# EAGLE board PCB#7 v2 (EAGLE 9.7.0)
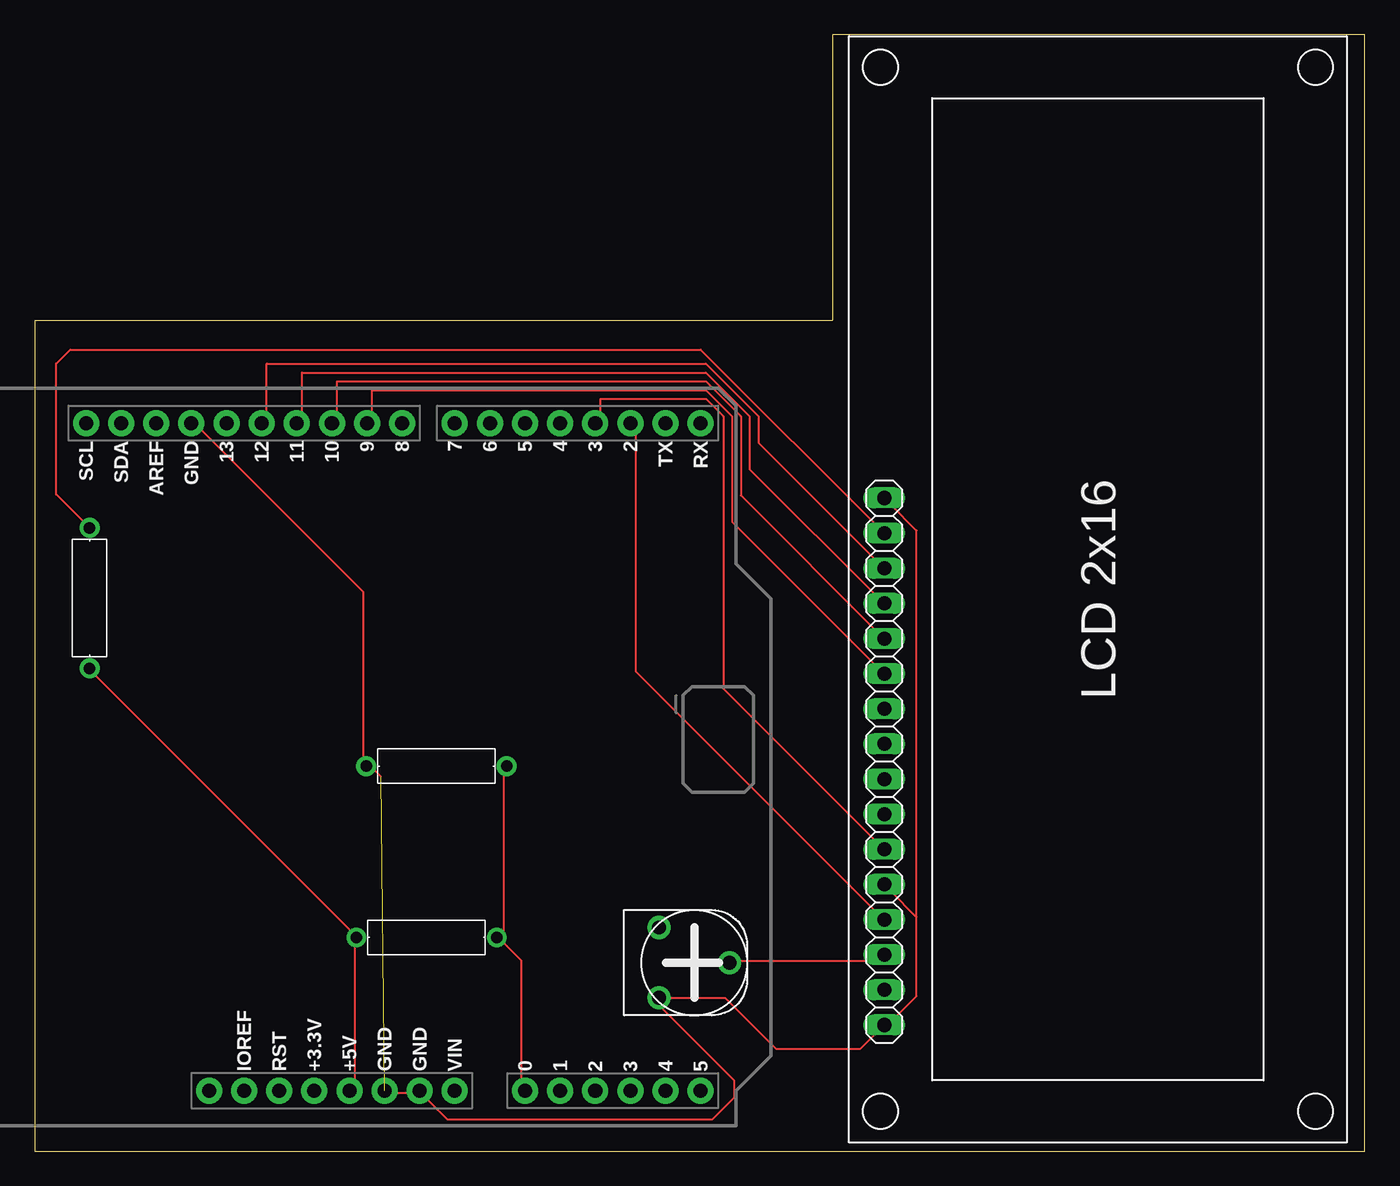
[diagram p0: board, top side]
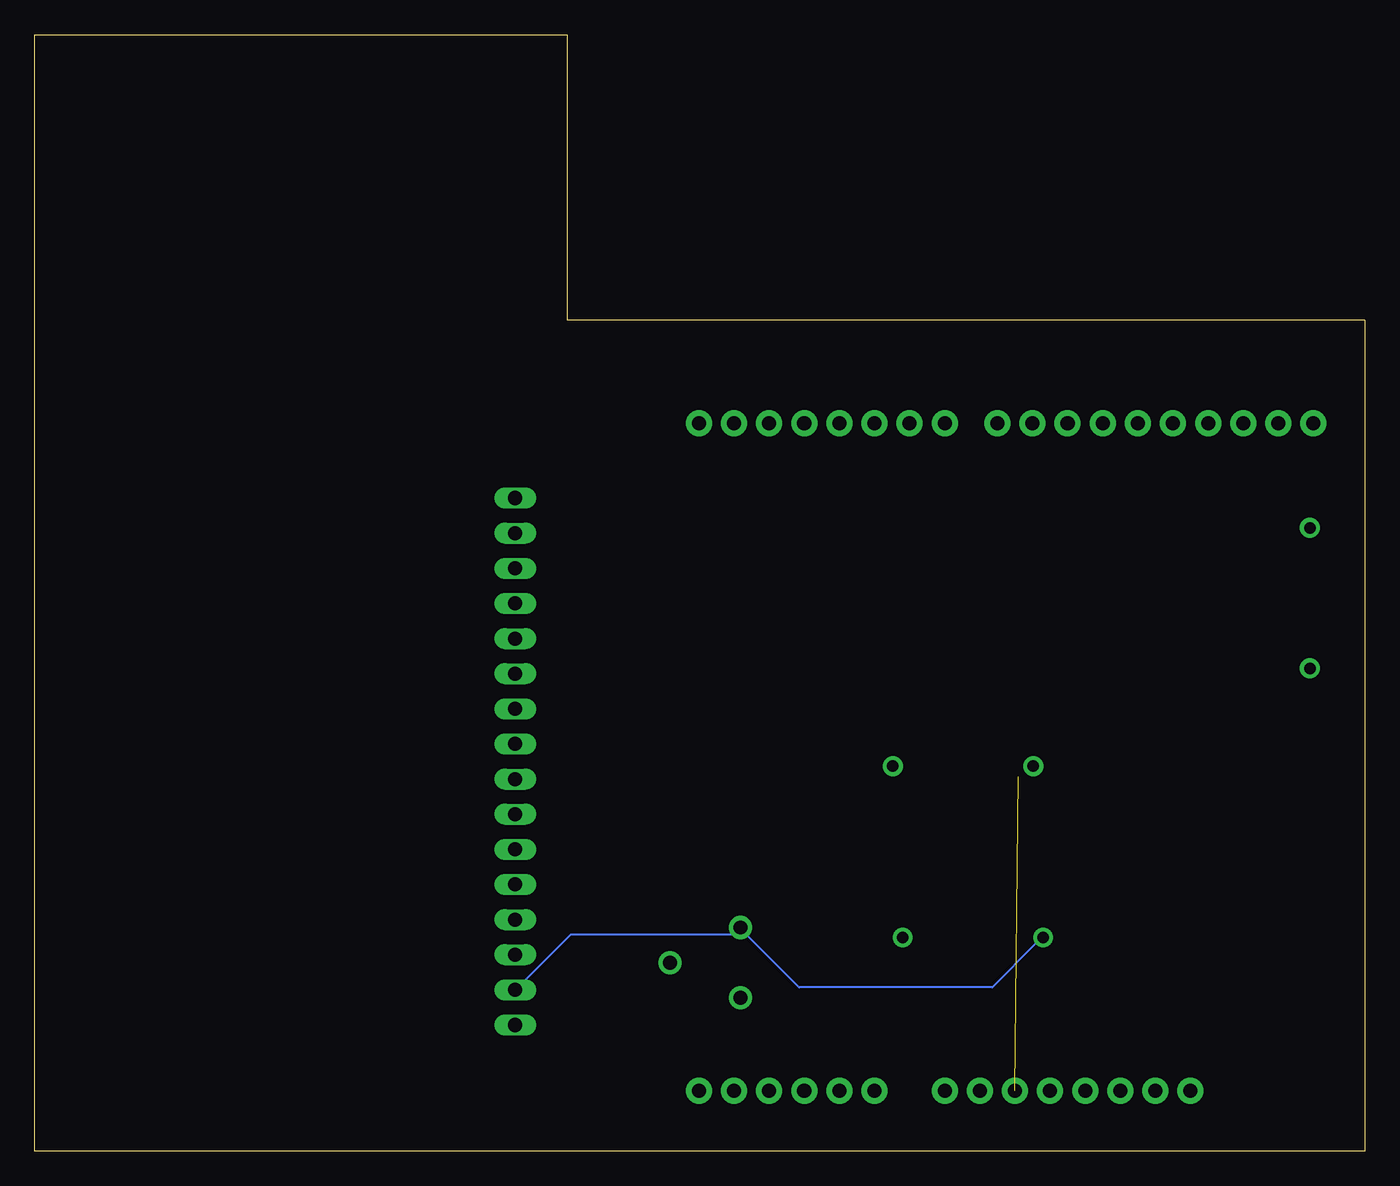
[diagram p1: board, bottom side, seen from below]

Size 96.22 x 80.73 mm. Coordinates in mm from the lower left corner, seen from the top.
Outline: 0,0 96.22,0 96.22,80.7 57.71,80.73 57.69,60.06 0,60.06 0,0
Copper layers (1*16): Top 0.035mm / dielectric 1.5mm / Bottom 0.035mm
Design rules "default": minimum track width 6mil, minimum drill 0.35mm, track to track 6mil, track to pad 6mil, pad to pad 6mil, via to via 6mil, smd to smd 6mil, copper to edge 40mil, drill to drill 6mil, minimum pad ring 10mil, minimum via ring 8mil, stop-mask expansion 4mil, vias tented up to drill 0mil, thermal gap 10mil

## Footprints (pad centres in the part's own frame; a part is rotated, then mirrored left to right if it is on the bottom)
RESAD1016W63L850D250B = drill 0.83 pad 1.43: 1 -5.08,0; 2 5.08,0
HA-06-SM065 = drill 1 pad 1.676: 1 -2.54,-2.54; 2 0,2.54; 3 2.54,-2.54
ARDUINO-UNO-R3-SHIELD = drill 1.016 pad 1.88: 3.3V 24.13,-2.54; 5V 24.13,0; A0 24.13,12.7; A1 24.13,15.24; A2 24.13,17.78; A3 24.13,20.32; A4 24.13,22.86; A5 24.13,25.4; AREF -24.13,-13.97; D2 -24.13,20.32; D3 -24.13,17.78; D4 -24.13,15.24; D5 -24.13,12.7; D6 -24.13,10.16; D7 -24.13,7.62; D8 -24.13,3.81; D9 -24.13,1.27; D10 -24.13,-1.27; D11 -24.13,-3.81; D12 -24.13,-6.35; D13 -24.13,-8.89; GND@0 24.13,2.54; GND@1 24.13,5.08; GND@2 -24.13,-11.43; IOREF 24.13,-7.62; NC 24.13,-10.16; RES 24.13,-5.08; RX -24.13,25.4; SCL -24.13,-19.05; SDA -24.13,-16.51; TX -24.13,22.86; VIN 24.13,7.62
JHD-162A = drill 1.016 long: 1 -19.05,0; 2 -16.51,0; 3 -13.97,0; 4 -11.43,0; 5 -8.89,0; 6 -6.35,0; 7 -3.81,0; 8 -1.27,0; 9 1.27,0; 10 3.81,0; 11 6.35,0; 12 8.89,0; 13 11.43,0; 14 13.97,0; 15 16.51,0; 16 19.05,0

## Placement (x,y rotation side)
R2  220  [RESAD1016W63L850D250B]  3.98,39.98 90 top
R3  1k  [RESAD1016W63L850D250B]  29.06,27.84 180 top
R4  1k  [RESAD1016W63L850D250B]  28.35,15.46 0 top
RPOT2  250k  [HA-06-SM065]  47.71,13.63 270 top
U3  ARDUINO-UNO-R3-SHIELD  [ARDUINO-UNO-R3-SHIELD]  22.77,28.5 270 top
U4  LCD-16X2JHD-162A  [JHD-162A]  61.45,28.17 90 top

## Library data of the parts
R2-R4 RPOT2 U3 U4 = Tinkercad

## Nets
U3_5V: R2.1 R4.1 RPOT2.1 U3.5V U4.2
U3_A0: R3.1 R4.2 U3.A0
U3_D2: U3.D2 U4.4
U3_D3: U3.D3 U4.6
U3_D9: U3.D9 U4.11
U3_D10: U3.D10 U4.12
U3_D11: U3.D11 U4.13
U3_D12: U3.D12 U4.14
U3_GND: R3.2 RPOT2.3 U3.GND@0 U3.GND@1 U3.GND@2 U4.1 U4.5 U4.16
U4_LED+: R2.2 U4.15
U4_VO: RPOT2.2 U4.3

## Tracks (layer width: path | path; a pad name or v marks a point on that pad's centre or on a via)
U3_5V
  Top 0.152: R2.1 4.1,34.7 23.15,15.66 R4.1 23.15,15.02 23.15,4.86 U3.5V
  Bottom 0.152: U4.2 61.25,11.84 57.44,15.66 45.37,15.66 RPOT2.1 44.74,15.66 40.93,11.84 26.96,11.84 23.78,15.02 R4.1
U3_A0
  Top 0.152: U3.A0 35.21,4.86 35.21,13.75 33.94,15.02 R4.2 33.94,15.66 33.94,27.72 R3.1
U3_D2
  Top 0.152: U4.4 61.25,16.92 43.47,34.7 43.47,52.48 U3.D2
U3_D3
  Top 0.152: U4.6 61.25,22.01 49.82,33.44 49.82,53.12 48.55,54.39 40.93,54.39 40.93,53.12 U3.D3
U3_D9
  Top 0.152: U4.11 61.25,34.7 50.45,45.5 50.45,53.12 48.55,55.03 24.42,55.03 24.42,53.12 U3.D9
U3_D10
  Top 0.152: U4.12 61.25,37.24 51.09,47.41 51.09,53.12 48.55,55.66 21.88,55.66 21.88,53.12 U3.D10
U3_D11
  Top 0.152: U4.13 61.25,39.78 51.72,49.31 51.72,53.12 48.55,56.3 19.34,56.3 19.34,53.12 U3.D11
U3_D12
  Top 0.152: U4.14 61.25,42.33 52.36,51.22 52.36,53.12 48.55,56.93 16.8,56.93 16.8,53.12 U3.D12
U3_GND  (1 unrouted)
  Top 0.152: 63.79,16.92 61.88,18.83 U4.5 | 63.79,16.92 63.79,11.21 61.88,9.3 U4.1 59.73,7.4 53.63,7.4 49.94,11.09 RPOT2.3 45.17,10.54 50.61,5.1 50.61,3.89 49.04,2.32 29.82,2.32 27.8,4.34 | 63.79,16.92 63.79,44.87 61.88,46.77 U4.16 | 25.05,27.09 24.42,27.72 R3.2 23.78,28.35 23.78,40.42 11.72,52.48 U3.GND@2 | 27.8,4.34 27.59,4.23 25.69,4.23 25.54,4.37 U3.GND@0 | 27.8,4.34 U3.GND@1
  Bottom 0.152: 61.25,9.3 U4.1 | 45.37,10.57 RPOT2.3
U4_LED+
  Top 0.152: R2.2 1.56,47.49 1.56,56.93 2.59,57.96 48.18,57.96 U4.15
U4_VO
  Top 0.152: U4.3 61.25,13.75 50.45,13.75 RPOT2.2